# Altium PCB PCB_TPA3116.PcbDoc
Units mm, origin at the board's own origin, x right, y up, seen from the top; angles counter-clockwise.
Board outline 57.53 x 79.76 mm, 2 copper layers (Top Layer, Bottom Layer), stack 1.57 mm thick; 49 components, 32 nets, 136 pads, 10 vias.
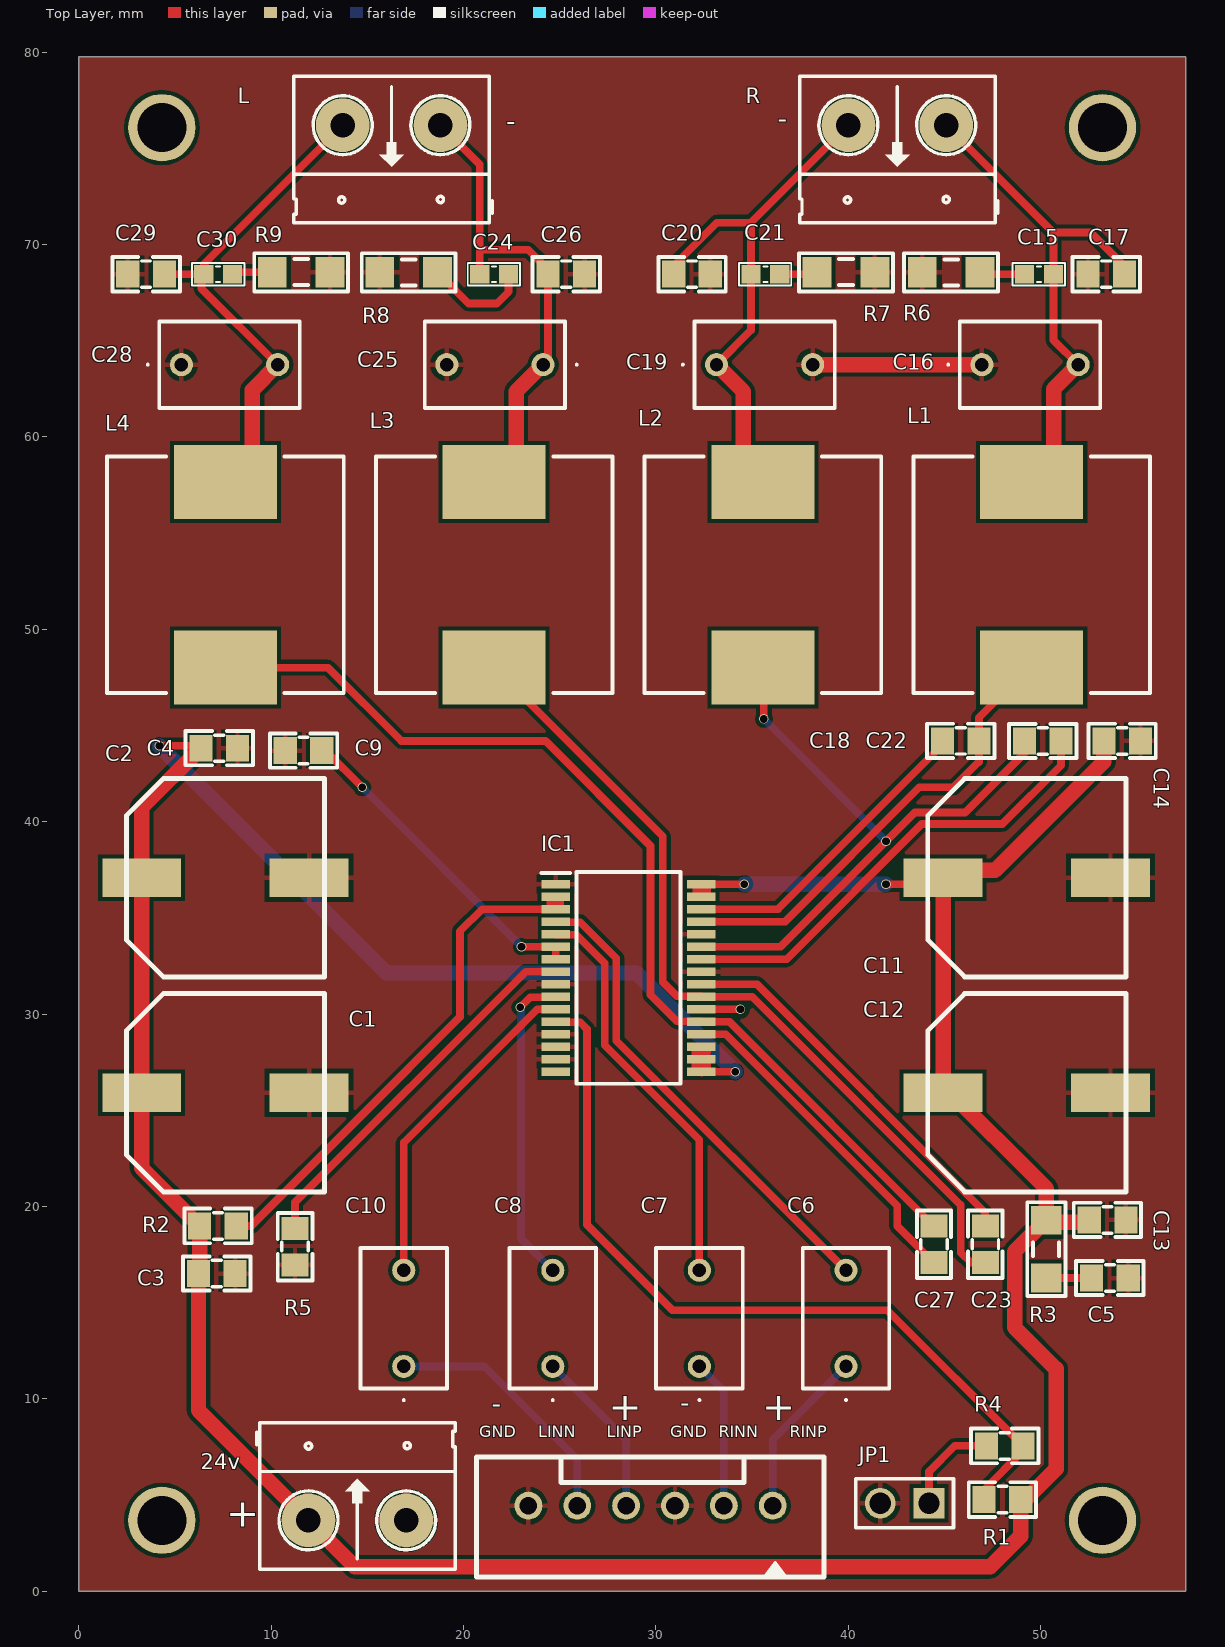
[diagram p0: Top Layer view]
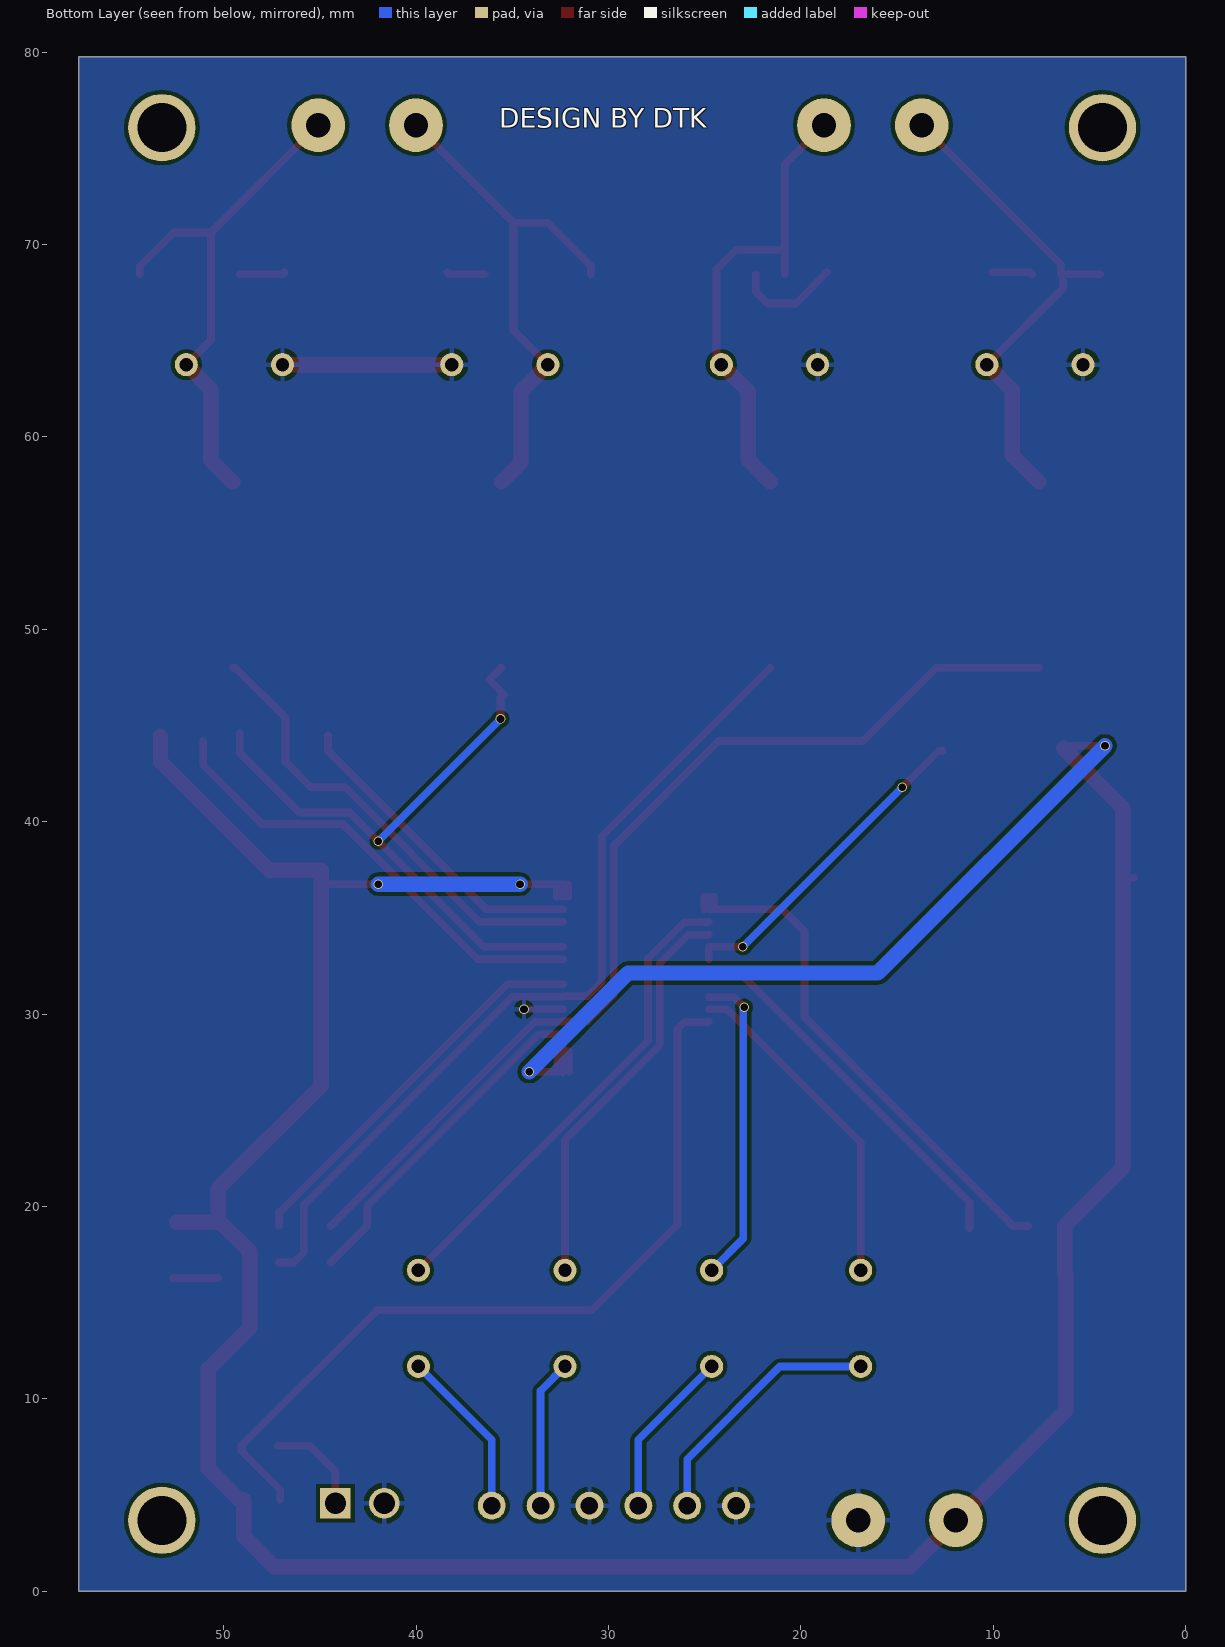
[diagram p1: Bottom Layer view, seen from below]
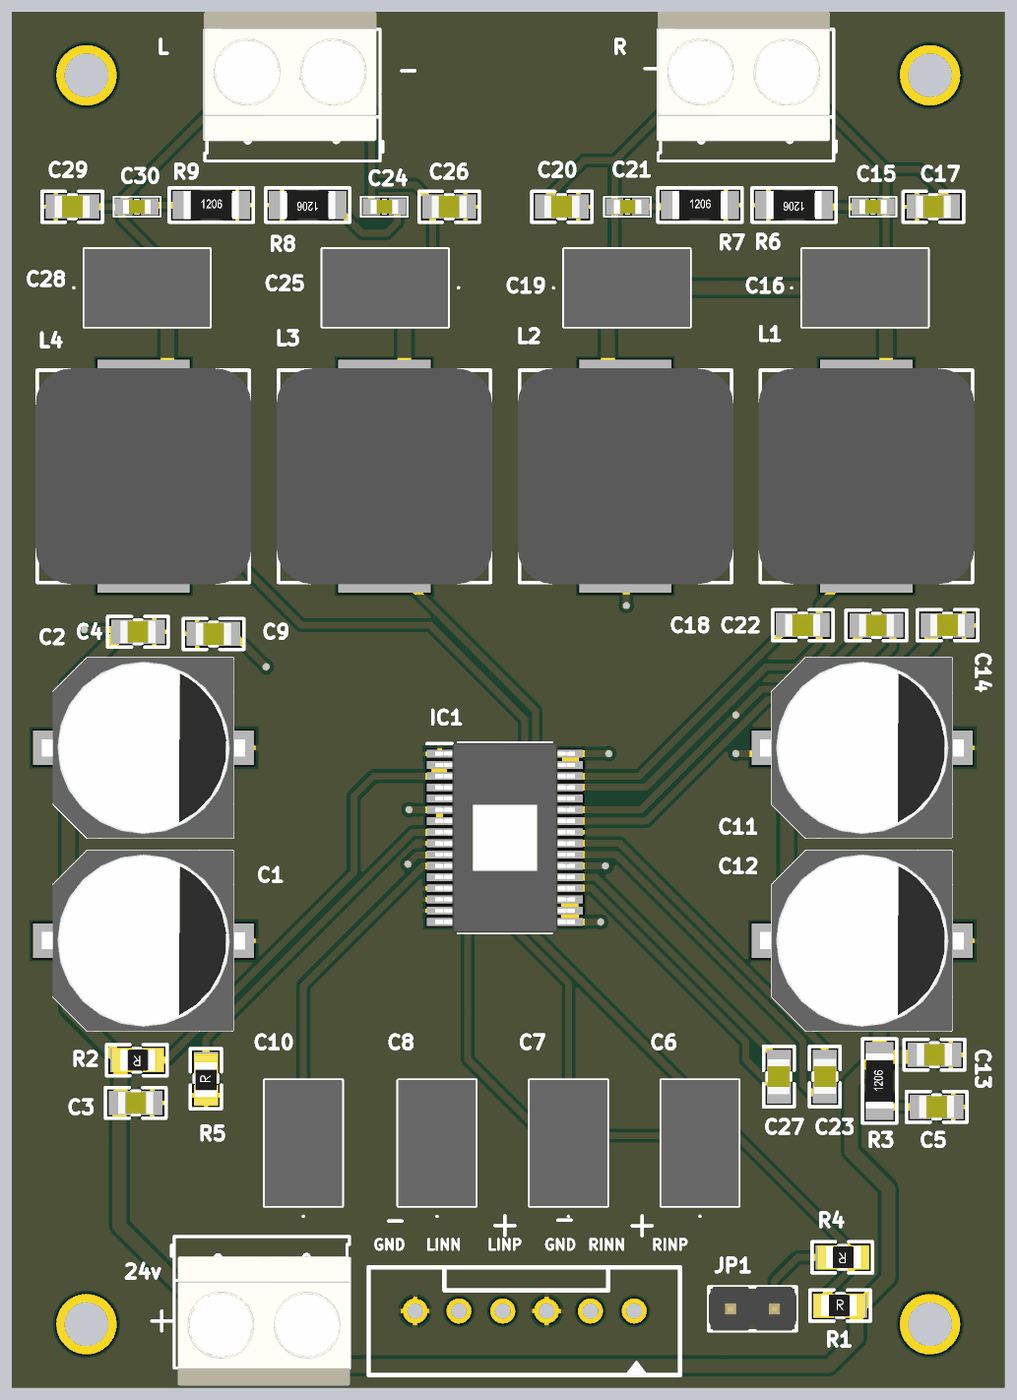
[diagram p2: 3D render of the assembled board from above, using the file's embedded part models]

## Layer stack, top to bottom
Top Solder: solder mask 0.01, Solder Resist, Dk 3.5
Top Layer: signal copper 0.035
Dielectric 1: dielectric 1.5, FR-4, Dk 4.8
Bottom Layer: signal copper 0.035
Bottom Solder: solder mask 0.01, Solder Resist, Dk 3.5

## Board outline
0,0 57.531,0 57.531,79.756 0,79.756

## Design rules (kind name [scope] priority, off if disabled: settings)
Clearance [All] p1: gap=0.2 ignorepadtopadclearanceinfootprint=FALSE
PolygonConnect [All] p1: connectstyle=Relief reliefconductorwidth=0.254 reliefentries=4 polygonreliefangle="90 Angle" airgapwidth=0.254
RoutingVias [All] p1: holewidth=0.3 width=0.6 viastyle="Through Hole" minholewidth=0.2 minwidth=0.4 maxholewidth=0.4 maxwidth=1
SolderMaskExpansion [All] p1: expansion=0.102
Width [All] p1: maxlimit=0.8 minlimit=0.2 preferedwidth=0.4
30 further rules are at their usual default settings.

## Classes and differential pairs
component class Sch_TPA3116: C1 C2 C3 C4 C5 C6 C7 C8 C9 C10 C11 C12 C13 C14 C15 C16 C17 C18 C19 C20 C21 C22 C23 C24 C25 C26 C27 C28 C29 C30 IC1 JP1 L1 L2 L3 L4 R1 R2 R3 R4 R5 R6 R7 R8 R9

## Components (designator, comment, footprint, x,y, rotation, side; value= is the part's Value field where it differs from the comment)
24v "Header 2" HED2 11.938,3.683 r0 top (schematic designator PWR)
C1 "470uF" "tu nhom 10 (G)" 7.62,25.908 r0 top
C2 "470uF" "tu nhom 10 (G)" 7.62,37.084 r0 top
C3 "104_0.1uF" "tu 0805" 7.169,16.513 r0 top
C4 "104_0.1uF" "tu 0805" 7.296,43.818 r0 top
C5 "104_0.1uF" "tu 0805" 53.594,16.28 r0 top
C6 "0.68uF" B32529C0684J000 39.878,11.684 r90 top
C7 "0.68uF" B32529C0684J000 32.258,11.684 r90 top
C8 "0.68uF" B32529C0684J000 24.638,11.684 r90 top
C9 "105_1uF" "tu 0805" 11.684,43.688 r180 top
C10 "0.68uF" B32529C0684J000 16.891,11.684 r90 top
C11 "470uF" "tu nhom 10 (G)" 49.276,37.084 r0 top
C12 "470uF" "tu nhom 10 (G)" 49.276,25.908 r0 top
C13 "104_0.1uF" "tu 0805" 53.467,19.304 r0 top
C14 "104_0.1uF" "tu 0805" 54.229,44.199 r0 top
C15 "103_10nF" "tu 0603" 49.911,68.453 r180 top
C16 "0.68uF" B32529C0684J000 46.943,63.754 r0 top
C17 "102_1nF" "tu 0805" 53.41,68.453 r180 top
C18 "220nF_0.22uF" "tu 0805" 45.842,44.199 r180 top
C19 "0.68uF" B32529C0684J000 33.147,63.754 r0 top
C20 "102_1nF" "tu 0805" 31.877,68.453 r180 top
C21 "103_10nF" "tu 0603" 35.687,68.456 r180 top
C22 "220nF_0.22uF" "tu 0805" 50.103,44.193 r0 top
C23 "220nF_0.22uF" "tu 0805" 47.117,18.034 r90 top
C24 "103_10nF" "tu 0603" 21.59,68.456 r180 top
C25 "0.68uF" B32529C0684J000 24.13,63.754 r180 top
C26 "102_1nF" "tu 0805" 25.343,68.453 r180 top
C27 "220nF_0.22uF" "tu 0805" 44.45,18.034 r270 top
C28 "0.68uF" B32529C0684J000 5.334,63.754 r0 top
C29 "102_1nF" "tu 0805" 3.499,68.453 r180 top
C30 "103_10nF" "tu 0603" 7.239,68.456 r0 top
IC1 "TPA3116D2DAD" SOP65P810X120-32N 28.575,31.877 r0 top
J1 "B6B-XH-A(LF)(SN)" CON6_100_B6B-XH-A_TH_ST 36.068,4.445 r180 top
JP1 "JP 1x2 2.54" "JP 1x2 DT" 44.196,4.572 r180 top
L "Header 2" HED2 18.796,76.2 r180 top (schematic designator HD2)
L1 "10uH" ind_dr125_10uH 49.53,52.832 r90 top
L2 "10uH" ind_dr125_10uH 35.56,52.832 r90 top
L3 "10uH" ind_dr125_10uH 21.59,52.832 r90 top
L4 "10uH" ind_dr125_10uH 7.62,52.832 r90 top
R "Header 2" HED2 45.085,76.2 r180 top (schematic designator HD1)
R1 "100k" "Tro SMD 0805" 48.006,4.826 r0 top
R2 "100k" "Tro SMD 0805" 7.239,18.923 r180 top
R3 "3.3R" "Tro SMD 1206" 50.292,17.78 r90 top
R4 "1k" "tro smd 0805" 48.133,7.493 r180 top
R5 "5k6" "Tro SMD 0805" 11.176,17.907 r90 top
R6 "3.3R" "Tro SMD 1206" 45.339,68.555 r180 top
R7 "3.3R" "Tro SMD 1206" 39.878,68.555 r0 top
R8 "3.3R" "Tro SMD 1206" 17.145,68.555 r180 top
R9 "3.3R" "Tro SMD 1206" 11.557,68.555 r0 top

## Footprints (in the part's own frame and the unit in brackets; to place one, negate y for a bottom-side part, rotate by r counter-clockwise, add the part's x,y. Pads: shape width x height; smd on the part's side, far side on the other; paste and mask are expansions set on the pad)
B32529C0684J000 [mm]
  round 1.2 hole 0.7: 1(0,0) 2(5,0)
  silkscreen extent -1.8,-2.25 6.15,2.25, body extent -1.15,-2.25 6.15,2.25, height 9.6
CON6_100_B6B-XH-A_TH_ST [mm] "Connector Header"
  round 1.45 hole 0.91: 1(0,0) 2(2.54,0) 3(5.08,0) 4(7.62,0) 5(10.16,0) 6(12.7,0)
  silkscreen extent -2.67,-2.54 15.39,3.71, body extent -2.42,-2.32 15.12,3.43, height 7
HED2 [mil] "Header 2, 2 pin, hight 300mil, Pin to Pin 200, Colour Green"
  round 110 hole 50: 1(0,0) 2(200,0)
  silkscreen extent -106,-100 300,200, body extent -92,-140 302,155, height 394
ind_dr125_10uH [mm] "Precision Wire Wound Inductor, 2-Leads, Body 12.15x12.15mm, IPC Medium Density"
  rect 3.85x5.35 smd: 1(-4.825,0) 2(4.825,0)
  silkscreen extent -6.15,-6.15 6.15,6.15, body extent -6.25,-6.25 6.25,6.25, height 6
"JP 1x2 DT" [mm] "2 pins, 1 row, straight, gold plating"
  rect 1.6x1.6 hole 1.1: 1(0,0)
  round 1.6 hole 1.1: 2(2.54,0)
  silkscreen extent -1.27,-1.27 3.81,1.27, body extent -1.27,-1.27 3.81,1.27, height 8.54
SOP65P810X120-32N [mm]
  rect 1.475x0.45 smd: 1(-3.788,4.875) 2(-3.788,4.225) 3(-3.788,3.575) 4(-3.788,2.925) 5(-3.788,2.275) 6(-3.788,1.625) 7(-3.788,0.975) 8(-3.788,0.325) 9(-3.788,-0.325) 10(-3.788,-0.975) 11(-3.788,-1.625) 12(-3.788,-2.275) 13(-3.788,-2.925) 14(-3.788,-3.575) 15(-3.788,-4.225) 16(-3.788,-4.875) 17(3.788,-4.875) 18(3.788,-4.225) 19(3.788,-3.575) 20(3.788,-2.925) 21(3.788,-2.275) 22(3.788,-1.625) 23(3.788,-0.975) 24(3.788,-0.325) 25(3.788,0.325) 26(3.788,0.975) 27(3.788,1.625) 28(3.788,2.275) 29(3.788,2.925) 30(3.788,3.575) 31(3.788,4.225) 32(3.788,4.875)
  silkscreen extent -4.52,-5.5 2.7,5.5, body extent -4.06,-5.5 4.06,5.5, height 1
"Tro SMD 0805" [mm]
  rect 1.2x1.4 smd: 1(-0.946,-0.061) 2(0.954,-0.061)
  silkscreen extent -1.75,-0.97 1.75,0.84, body extent -1.56,-0.76 1.44,0.64, height 0.53
"tro smd 0805" [mm]
  rect 1.2x1.4 smd: 1(-0.946,-0.061) 2(0.954,-0.061)
  silkscreen extent -1.75,-0.97 1.75,0.84, body extent -1.56,-0.76 1.44,0.64, height 0.53
"Tro SMD 1206" [mm]
  rect 1.5x1.6 smd: 1(-1.5,0) 2(1.5,0)
  silkscreen extent -2.44,-0.99 2.44,0.99, body extent -1.6,-0.8 1.6,0.8, height 0.6
"tu 0603" [mm] "Chip Capacitor, 2-Leads, Body 1,60x0,80mm, IPC Medium Density"
  rect 1x0.95 smd mask+0.076: 1(-0.75,0) 2(0.75,0)
  silkscreen extent -1.35,-0.58 1.37,0.58, body extent -0.8,-0.4 0.8,0.4, height 0.9
"tu 0805" [mm] "Compoment SMD 80x50mil"
  rect 1.2x1.4 smd: 1(-0.946,-0.003) 2(0.954,-0.003)
  silkscreen extent -1.75,-0.89 1.75,0.89, body extent -1.01,-0.64 1.01,0.63, height 0.61
"tu nhom 10 (G)" [mm]
  rect 4.1x2 smd: 1(-4.35,0) 2(4.35,0)
  silkscreen extent -5.15,-5.15 5.15,5.15, body extent -5.9,-5.25 5.9,5.25, height 10.5

## Part data
24v L R: library part Hed2, "Header 2 (Green)"
C1 C2 C11 C12: library part "Tu Nhom 470uF 35V", "Dán", Chung_Loai=Dán, Don_Vi=Con, Ma_Hang=MH004418, So_Chan=2, Ten_Linh_Kien="T? Nhôm 470uF 35V 10x10.5MM"
C3 C4 C5 C13 C14: library part "Tu 0805 104 50V 10%", "Dán", Chung_Loai=Dán, Don_Vi=Con, Ma_Hang=MH004551, So_Chan=2, Ten_Linh_Kien="T? 0805 104-100nF 10% 50V"
C6 C7 C8 C10 C16 C19 C25 C28: library part 0.68uF/63V, "Capacitor", Arrow Part Number=B32529C0684J000, Manufacturer_Name=TDK, Arrow Price/Stock=https://www.arrow.com/en/products/b32529c0684j000/epcos-tdk, Datasheet Link=https://product.tdk.com/system/files/dam/doc/product/capacitor/film/mkt/data_sheet/20/20/db/fc_2009/b32520_529.pdf, Height=9.5mm, Manufacturer_Part_Number=B32529C0684J000
C9: library part "Tu 0805 105 50V 10%", "Dán", Chung_Loai=Dán, Don_Vi=Con, Ma_Hang=MH004552, So_Chan=2, Ten_Linh_Kien="T? 0805 105-1uF 10% 50V"
C15 C21 C24 C30: library part "Tu 0603 103 50V 10%", "Dán", Chung_Loai=Dán, Don_Vi=Con, Ma_Hang=MH004567, So_Chan=2, Ten_Linh_Kien="T? 0603 103-10nF 10% 50V"
C17 C20 C26 C29: library part "Tu 0805 102 50V 10%", "Dán", Chung_Loai=Dán, Don_Vi=Con, Ma_Hang=MH004549, So_Chan=2, Ten_Linh_Kien="T? 0805 102-1nF 10% 50V"
C18 C22 C23 C27: library part "Tu 0805 220nF 50V 10%", "Dán", Chung_Loai=Dán, Don_Vi=Con, Ma_Hang=MH008099, So_Chan=2, Ten_Linh_Kien="T? 0805 220nF 50V 10%"
IC1: "Integrated Circuit", Manufacturer_Name="Texas Instruments", Mouser Part Number=595-TPA3116D2DAD, Arrow Part Number=TPA3116D2DAD, Arrow Price/Stock=https://www.arrow.com/en/products/tpa3116d2dad/texas-instruments?region=nac, Datasheet Link=http://www.ti.com/lit/ds/symlink/tpa3116d2.pdf, Height=1.2mm, Manufacturer_Part_Number=TPA3116D2DAD, Mouser Price/Stock=https://www.mouser.co.uk/ProductDetail/Texas-Instruments/TPA3116D2DAD?qs=3AcK5DacLbr72W1Ouw7j4Q%3D%3D
J1: library part CON-PLG_6X1-100-ST-TH, "6 Pins, 1 Row 2.54mm Pitch, straight Connector, male", Alternate Part Number-1=NA, Case/Package=TH-CON, Crimp Part Number=ASXHSXH22K51, Manufacturer=JST, Mating Part Number=XHP-6, Manufacturer Part Number=B6B-XH-A(LF)(SN), Supplier-1=ARROW, Supplier Part Number-1=B6B-XH-A(LF)(SN)
JP1: library part "JP 1x2 2.54 Duc Thang", "C?m", Chung_Loai=C?m, Don_Vi=Con, Ma_Hang=MH000903, Ten_Linh_Kien="Jump Ðon Ð?c 2.54MM 1x40P Th?ng 11MM"
L1 L2 L3 L4: library part ind_dr125_100_10uH
R1 R2: library part R0805_100k_1%, "Resistor", Arrow Part Number=CR0603-FX-1202ELF, Manufacturer_Name=Bourns, Mouser Part Number=652-CR0603FX-1202ELF, Arrow Price/Stock=https://www.arrow.com/en/products/cr0603-fx-1202elf/bourns, Datasheet Link=https://www.bourns.com/pdfs/chpreztr.pdf, Height=0.55mm, Manufacturer_Part_Number=CR0603-FX-1202ELF, Mouser Price/Stock=https://www.mouser.com/Search/Refine.aspx?Keyword=652-CR0603FX-1202ELF
R3 R6 R7 R8 R9: library part R1206_3.3R_1/2W, "Resistor", Arrow Part Number=CR0603-FX-1202ELF, Manufacturer_Name=Bourns, Mouser Part Number=652-CR0603FX-1202ELF, Arrow Price/Stock=https://www.arrow.com/en/products/cr0603-fx-1202elf/bourns, Datasheet Link=https://www.bourns.com/pdfs/chpreztr.pdf, Height=0.55mm, Manufacturer_Part_Number=CR0603-FX-1202ELF, Mouser Price/Stock=https://www.mouser.com/Search/Refine.aspx?Keyword=652-CR0603FX-1202ELF
R4: library part "Tro 0805 1% 1k", "Dán", Chung_Loai=Dán, Don_Vi=Con, Ma_Hang=MH005468, So_Chan=2, Ten_Linh_Kien="Tr? 0805 1% 1k"
R5: library part R0805_5k6_1%, "Resistor", Arrow Part Number=CR0603-FX-1202ELF, Manufacturer_Name=Bourns, Mouser Part Number=652-CR0603FX-1202ELF, Arrow Price/Stock=https://www.arrow.com/en/products/cr0603-fx-1202elf/bourns, Datasheet Link=https://www.bourns.com/pdfs/chpreztr.pdf, Height=0.55mm, Manufacturer_Part_Number=CR0603-FX-1202ELF, Mouser Price/Stock=https://www.mouser.com/Search/Refine.aspx?Keyword=652-CR0603FX-1202ELF

## Free pads (board coordinates)
  round 3.5 hole 2.54: ""(4.318,3.683) ""(4.318,76.073) ""(53.213,3.683) ""(53.213,76.073)

## Via types
v1: diameter 0.5, hole 0.4, Top Layer to Bottom Layer, tented both sides, 10 vias

## Nets (pads, with @x,y where several pads share a name; then routed paths per layer and width w, separated by ;. In a path a pad name is that pad's centre, name@x,y a point inside that pad or via, vN(x,y) a via of type N, cw(c..) or ccw(c..) an arc to the next point about the centre after c; other vN are vias at no path point)
24V: 24v.1 C1.1 C2.1 C3.1 C4.1 C11.1 C12.1 C13.1 C14.1 IC1.17 IC1.18 IC1.19 IC1.31 IC1.32 R1.2 R2.2 R3.2 | length 197
  Top Layer w0.4: C2.1@2.667,37.084 C2.1 ; v1(4.191,43.942) 6.223,43.942 C4.1 ; IC1.17@32.042,27.017 32.042,28.048 ; IC1.31@32.101,36.102 IC1.32@32.101,36.752 ; IC1.18@32.316,27.574 IC1.19@32.316,28.224 ; IC1.17 IC1.17@32.385,27.002 ; IC1.31 IC1.32 IC1.32@32.674,36.752 ; IC1.17@32.385,26.958 IC1.17@32.385,27.002 ; IC1.18@32.385,27.608 IC1.17@32.385,27.002 ; IC1.18@32.628,27.663 IC1.19@32.651,28.292 ; IC1.18@32.651,27.54 IC1.17@32.651,27.002 ; IC1.31@32.674,36.102 IC1.32@32.674,36.752 ; v1(34.114,27.002) IC1.17@32.651,27.002 ; v1(34.593,36.752) IC1.32@32.674,36.752 ; v1(41.959,36.752) 44.721,36.752 C11.1@44.926,36.957 ; IC1.17@32.385,27.002 IC1.17@32.651,27.002
  Top Layer w0.8: C4.1 3.27,40.735 C2.1 C1.1 3.27,21.998 R2.2 6.285,16.572 C3.1 6.223,9.398 24v.1 14.351,1.27 47.371,1.27 48.96,2.859 R1.2 49.215,4.765 50.8,6.35 50.8,11.557 48.641,13.716 48.641,17.653 R3.2@50.292,19.304 ; C13.1@52.451,19.177 50.292,19.177 R3.2 R3.2@50.292,19.304 ; C14.1@53.283,44.447 C14.1 53.283,43.123 47.625,37.465 44.926,37.465 C11.1 44.926,36.957 44.926,26.289 50.292,20.923 R3.2@50.292,19.304
  Bottom Layer w0.8: v1(4.191,43.942) 16.002,32.131 28.985,32.131 v1(34.114,27.002) ; v1(34.593,36.752) v1(41.959,36.752)
BSNL: C27.2 IC1.20 | length 17.6
  Top Layer w0.4: IC1.20 33.626,28.952 42.545,20.033 42.545,18.981 C27.2
BSNR: C22.2 IC1.26 | length 24.1
  Top Layer w0.4: IC1.26 36.789,32.852 43.815,39.878 48.006,39.878 51.058,42.93 C22.2
BSPL: C23.2 IC1.24 | length 20.4
  Top Layer w0.4: IC1.24 35.25,31.552 47.12,19.682 C23.2
BSPR: C18.2 IC1.30 | length 16.4
  Top Layer w0.4: IC1.30 36.341,35.452 44.577,43.688 C18.2@44.577,44.45
GND: 24v.2 C1.2 C2.2 C3.2 C4.2 C5.2 C9.2 C11.2 C12.2 C13.2 C14.2 C16.1 C17.2 C19.2 C20.1 C25.2 C26.1 C28.1 C29.2 IC1.1 IC1.9 IC1.13 IC1.14 IC1.15 IC1.22 IC1.25 IC1.28 J1.3 J1.6 JP1.2 R5.1 R6.2 R7.2 R8.2 R9.2 | length 10.8
  Top Layer w0.4: IC1.22 v1(34.391,30.252)
  Top Layer w0.8: C19.2 C16.1
LINN: C10.2 IC1.11 | length 17.4
  Top Layer w0.4: C10.2 16.891,23.32 23.823,30.252 IC1.11
LINP: C8.2 IC1.10 | length 16.4
  Top Layer w0.4: v1(22.95,30.353) 23.474,30.877 24.762,30.877 IC1.10
  Bottom Layer w0.4: v1@22.987,30.353 22.987,18.335 C8.2
NetC5_1: C5.1 R3.1 | length 2.4
  Top Layer w0.4: R3.1 52.645,16.28 C5.1
NetC6_1: C6.1 J1.1 | length 8.2
  Bottom Layer w0.4: J1.1@36.068,5.08 36.068,7.874 C6.1
NetC7_1: C7.1 J1.2 | length 7.1
  Bottom Layer w0.4: C7.1 33.528,10.414 J1.2@33.528,5.08
NetC8_1: C8.1 J1.4 | length 8.2
  Bottom Layer w0.4: C8.1 28.448,7.874 J1.4@28.448,5.08
NetC9_1: C9.1 IC1.6 IC1.7 | length 17
  Top Layer w0.4: C9.1 12.824,43.691 v1(14.732,41.783) ; v1(23.013,33.502) IC1.6 IC1.7
  Bottom Layer w0.4: v1(14.732,41.783) v1(23.013,33.502)
NetC10_1: C10.1 J1.5 | length 12.8
  Bottom Layer w0.4: C10.1 21.082,11.684 25.908,6.858 J1.5@25.908,5.08
NetC15_1: C15.1 C16.2 C17.1 L1.2 R.1 | length 27.2
  Top Layer w0.4: R.1 50.661,70.624 ; C16.2 50.661,65.036 C15.1 50.661,70.624 ; C17.1 54.356,68.866 52.598,70.624 50.661,70.624
  Top Layer w0.8: L1.2 50.673,58.8 50.673,62.484 C16.2
NetC15_2: C15.2 R6.1 | length 2.4
  Top Layer w0.4: R6.1 46.941,68.453 C15.2
NetC19_1: C19.1 C20.2 C21.2 L2.2 R.2 | length 27.8
  Top Layer w0.4: C20.2 30.923,68.896 33.159,71.132 34.937,71.132 ; C19.1 34.937,65.544 C21.2 34.937,71.132 ; R.2 34.937,71.132
  Top Layer w0.8: C19.1 34.544,62.357 34.544,58.673 L2.2
NetC21_1: C21.1 R7.1 | length 2
  Top Layer w0.4: C21.1 38.28,68.456 R7.1
NetC24_1: C24.1 R8.1 | length 5.5
  Top Layer w0.4: R8.1 20.271,66.929 21.717,66.929 22.34,67.552 C24.1
NetC24_2: C24.2 C25.1 C26.2 L3.2 L.1 | length 24.8
  Top Layer w0.4: L.1 20.84,74.156 20.84,69.723 ; C24.2 20.84,69.723 ; C25.1 24.389,64.013 C26.2 24.389,68.702 23.368,69.723 20.84,69.723
  Top Layer w0.8: L3.2 22.733,58.8 22.733,62.357 C25.1
NetC28_2: C28.2 C29.1 C30.1 L4.2 L.2 | length 26
  Top Layer w0.4: C29.1 C30.1 6.489,68.973 L.2 ; C30.1@6.374,68.099 6.374,67.714 C28.2
  Top Layer w0.8: L4.2 9.017,59.054 9.017,62.437 C28.2
NetC30_2: C30.2 R9.1 | length 2.1
  Top Layer w0.4: C30.2 8.087,68.555 R9.1
NetIC1_2: IC1.2 IC1.3 R2.1 | length 28
  Top Layer w0.4: R2.1 8.951,18.984 14.565,24.598 19.812,29.845 19.812,34.294 20.97,35.452 IC1.3@24.511,35.452 ; IC1.2@24.511,36.102 IC1.3@24.511,35.452 ; IC1.2 IC1.3 IC1.3@24.511,35.452 ; IC1.3@25.019,35.452 IC1.2@25.019,36.102
NetIC1_8: IC1.8 R5.2 | length 19.9
  Top Layer w0.4: R5.2 11.237,20.212 23.227,32.202 IC1.8
NetIC1_12: IC1.12 R1.1 R4.1 | length 43
  Top Layer w0.4: IC1.12 24.812,29.577 26.057,29.577 26.416,29.218 26.416,19.05 30.861,14.605 42.027,14.605 R4.1 49.079,7.296 47.06,5.277 R1.1
NetJP1_1: JP1.1 R4.2 | length 5.2
  Top Layer w0.4: JP1.1 44.196,6.223 45.527,7.554 R4.2
OUTNL: C27.1 IC1.21 L4.1 | length 53.4
  Top Layer w0.4: L4.1 12.953,48.007 16.764,44.196 24.257,44.196 29.718,38.735 29.718,31.002 31.093,29.627 32.338,29.627 IC1.21 33.824,29.602 C27.1
OUTNR: C22.1 IC1.27 L2.1 | length 34.3
  Top Layer w0.4: IC1.27 36.472,33.502 v1(41.959,38.989) 43.448,40.478 46.066,40.478 49.158,43.57 C22.1 C22.1@49.158,44.586 ; L2.1 36.196,47.372 35.423,46.599 35.609,46.414 v1(35.609,45.339)
  Bottom Layer w0.4: v1(35.609,45.339) v1(41.959,38.989)
OUTPL: C23.1 IC1.23 L3.1 | length 44.2
  Top Layer w0.4: L3.1 30.353,39.244 30.353,31.667 31.093,30.927 32.338,30.927 IC1.23 35.011,30.902 45.842,20.071 45.842,17.601 46.355,17.088 C23.1
OUTPR: C18.1 IC1.29 L1.1 | length 24
  Top Layer w0.4: IC1.29 36.707,34.802 43.688,41.783 45.466,41.783 46.788,43.105 C18.1 46.788,45.396 49.399,48.007 L1.1
RINN: C7.2 IC1.5 | length 21.2
  Top Layer w0.4: IC1.5 24.812,34.127 25.859,34.127 27.34,32.646 27.34,28.373 32.258,23.455 C7.2
RINP: C6.2 IC1.4 | length 25.1
  Top Layer w0.4: IC1.4 24.812,34.777 26.057,34.777 27.94,32.894 27.94,28.622 C6.2
pads on no net: IC1.16

## Polygon pours and split planes (outlines as drawn)
GND on Top Layer "Top Layer-No Net1" (solid, pour order 11): 0,0 57.531,0 57.531,79.756 0,79.756
no net on Top Layer "Top Layer-No Net" (solid, remove dead copper, pour order 0): 0,0 57.531,0 57.531,79.756 0,79.756
GND on Bottom Layer "bottomLayer-No Net2" (solid, pour order 12): 0,0 57.531,0 57.531,79.756 0,79.756
no net on Bottom Layer "Bottom Layer-No Net" (solid, remove dead copper, pour order 3): 0,0 57.531,0 57.531,79.756 0,79.756

## Silkscreen, mask and mechanical layers (free items; w line width, h text height)
Top Overlay:
  text "-" at 36.322,76.073 h1
  text "-" at 22.225,75.946 h1
  text "-" at 31.275,9.322 h1
  text "-" at 21.463,9.271 h1
  text "+" at 27.559,8.89 h1.5
  text "+" at 35.512,8.874 h1.5
  text "GND" at 20.828,8.001 h0.6
  text "LINN" at 23.876,8.001 h0.6
  text "LINP" at 27.432,8.001 h0.6
  text "GND" at 30.734,8.001 h0.6
  text "RINN" at 33.274,8.001 h0.6
  text "RINP" at 36.957,8.001 h0.6
  text "+" at 7.674,3.362 h1.5
Bottom Overlay:
  text "DESIGN BY DTK" at 35.687,76.073 h1